# EAGLE board SmartSwitchBoard4x1 (EAGLE 6.2)
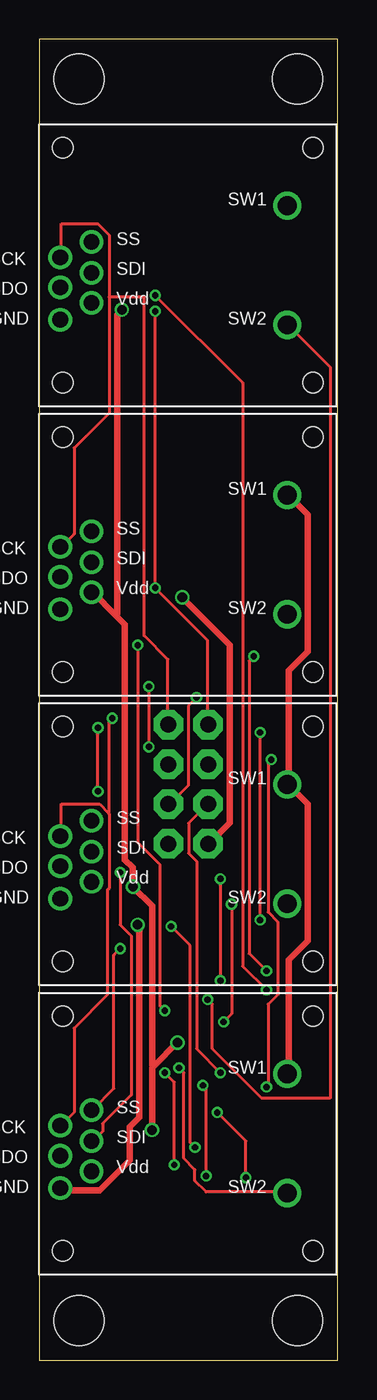
[diagram p0: board, top side]
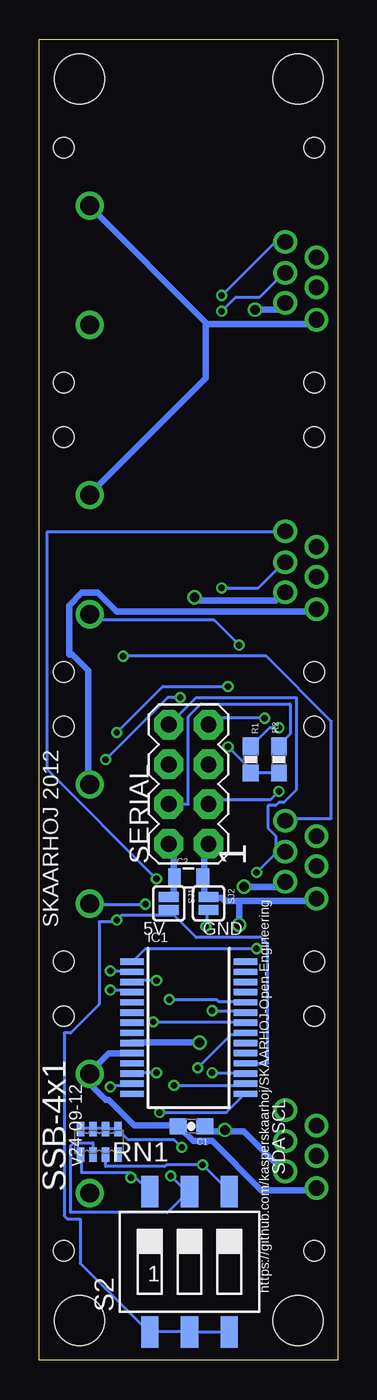
[diagram p1: board, bottom side, seen from below]

Size 19.08 x 84.45 mm. Coordinates in mm from the lower left corner, seen from the top.
Outline: 0,0 19.08,0 19.08,84.45 0,84.45 0,0
Copper layers (1*16): Top 0.035mm / dielectric 1.5mm / Bottom 0.035mm
Design rules: minimum track width 6mil, minimum drill 12mil, track to track 6mil, track to pad 6mil, pad to pad 6mil, via to via 6mil, smd to smd 0mil, copper to edge 10mil, drill to drill 10mil, minimum pad ring 10mil, minimum via ring 6mil, stop-mask expansion 2mil, vias tented up to drill 100mil, thermal gap 10mil
Net classes: 0 default: width 0.203 mm, drill 0.406 mm, clearance 0.203 mm; 1 Power: width 0.406 mm, drill 0.61 mm, clearance 0.203 mm
Holes 3.2 mm at 2.54,81.92 2.54,2.54 16.51,2.54 16.51,81.92

## Footprints (pad centres in the part's own frame; a part is rotated, then mirrored left to right if it is on the bottom)
0603-CAP = smd 1.1 x 1: 1 -0.85,0; 2 0.85,0
0805 = smd 0.8 x 1.2: 1 -0.9,0; 2 0.9,0
SSOP28 = smd 0.4 x 1.5: 1 -4.225,-3.625; 2 -3.575,-3.625; 3 -2.925,-3.625; 4 -2.275,-3.625; 5 -1.625,-3.625; 6 -0.975,-3.625; 7 -0.325,-3.625; 8 0.325,-3.625; 9 0.975,-3.625; 10 1.625,-3.625; 11 2.275,-3.625; 12 2.925,-3.625; 13 3.575,-3.625; 14 4.225,-3.625; 15 4.225,3.625; 16 3.575,3.625; 17 2.925,3.625; 18 2.275,3.625; 19 1.625,3.625; 20 0.975,3.625; 21 0.325,3.625; 22 -0.325,3.625; 23 -0.975,3.625; 24 -1.625,3.625; 25 -2.275,3.625; 26 -2.925,3.625; 27 -3.575,3.625; 28 -4.225,3.625
0603-RES = smd 1.1 x 1: 1 -0.85,0; 2 0.85,0
CAY16_HAND = smd 0.5 x 0.904: 1 -1.2,-0.813; 2 -0.4,-0.813; 3 0.4,-0.813; 4 1.2,-0.813; 5 1.2,0.813; 6 0.4,0.813; 7 -0.4,0.813; 8 -1.2,0.813
SMS-003 = smd 1.092 x 2.007: 1 -2.54,-4.496; 2 0,-4.496; 3 2.54,-4.496; 4 2.54,4.496; 5 0,4.496; 6 -2.54,4.496
2X4 = drill 1.016 pad 1.88 octagon: 1 -3.81,-1.27; 2 -3.81,1.27; 3 -1.27,-1.27; 4 -1.27,1.27; 5 1.27,-1.27; 6 1.27,1.27; 7 3.81,-1.27; 8 3.81,1.27
SJ_2S = smd 0.635 x 1.27: 1 -0.412,0; 2 0.412,0
SMART_SWITCH = drill 1.2: 1 6.35,3.81; 2 6.35,-3.81 | drill 1: 3 -8.153,-3.48; 4 -6.147,-2.413; 5 -8.153,-1.422; 6 -6.147,-0.483; 7 -8.153,0.508; 8 -6.147,1.499 | hole 1.3: -8.001,7.506; 8.001,7.506; 8.001,-7.506; -8.001,-7.506

## Placement (x,y rotation side)
C1  100nF  [0603-CAP]  9.35,14.96 0 bottom
C3  10uF  [0805]  9.53,30.84 0 bottom
IC1  MCP23017SS  [SSOP28]  9.53,21.26 270 bottom
R1  10K  [0603-RES]  5.56,38.4 90 bottom
R2  10K  [0603-RES]  3.76,38.4 90 bottom
RN1  10K  [CAY16_HAND]  15.24,13.97 180 bottom
S2  SWS003  [SMS-003]  9.47,6.3 0 bottom
SERIAL  M04X2  [2X4]  9.53,36.83 90 bottom
SJ1  SOLDERJUMPERNC  [SJ_2S]  10.79,29.21 270 bottom
SJ2  SOLDERJUMPERNC  [SJ_2S]  8.26,29.21 270 bottom
U$2  SMART_SWITCHSMART_SWITCH_8PIN  [SMART_SWITCH]  9.5,14.5 0 top
U$3  SMART_SWITCHSMART_SWITCH_8PIN  [SMART_SWITCH]  9.5,33 0 top
U$4  SMART_SWITCHSMART_SWITCH_8PIN  [SMART_SWITCH]  9.5,51.5 0 top
U$5  SMART_SWITCHSMART_SWITCH_8PIN  [SMART_SWITCH]  9.5,70 0 top

## Library data of the parts
C1 C3 R1 R2 SERIAL SJ1 SJ2 = SparkFun
IC1 = microchip; MF: MICROCHIP; MPN: MCP23017-E/SS; OC_FARNELL: 1467674; OC_NEWARK: 31K2960
RN1 = SKAARHOJ; OC_FARNELL: unknown; OC_NEWARK: unknown
S2 = smd-special
U$2-U$5 = SKAARHOJ

## Nets
5V [Power]: C1.2 C3.1 IC1.9 SERIAL.2 SJ1.1 U$2.4 U$3.4 U$4.4 U$5.4
5VL: IC1.18 R1.1 R2.1 S2.1 S2.2 S2.3 SJ1.2
A0: IC1.15 RN1.5 S2.6
A1: IC1.16 RN1.6 S2.5
A2: IC1.17 RN1.7 S2.4
DISP_DATA_OUT: SERIAL.6
GND [Power]: C1.1 C3.2 IC1.10 SERIAL.1 SJ2.1 U$2.1 U$2.3 U$3.1 U$3.3 U$4.1 U$4.3 U$5.1 U$5.3
GNDL: RN1.1 RN1.2 RN1.3 RN1.4 SJ2.2
GPA0: IC1.21 U$2.2
GPA1: IC1.22 U$3.2
GPA2: IC1.23 U$4.2
GPA3: IC1.24 U$5.2
GPB0: IC1.1 U$2.8
GPB1: IC1.2 U$3.8
GPB2: IC1.3 U$4.8
GPB3: IC1.4 U$5.8
I2C_SCL: IC1.12 R2.2 SERIAL.4
I2C_SDA: IC1.13 R1.2 SERIAL.3
SDI_MOSI: SERIAL.8 U$2.6 U$3.6 U$4.6 U$5.6
SDI_SCLK: SERIAL.7 U$2.7 U$3.7 U$4.7 U$5.7
SLIDER_IN: SERIAL.5

## Tracks (layer width: path | path; a pad name or v marks a point on that pad's centre or on a via)
5V  (via drill 0.61)
  Top 0.406: 7.32,18.8 7.21,18.69 v7.21,14.73 | 7.32,18.8 v8.84,20.32 | 7.32,18.8 7.21,18.9 7.21,29.06 v5.99,30.28 5.99,31.5 5.49,32 5.49,47.04 4.88,47.65 | 4.88,47.65 3.45,49.07 U$4.4 | v5.28,67.16 4.98,66.85 4.98,47.75 4.88,47.65 | v9.14,48.77 12.19,45.72 12.19,34.34 10.87,33.02 SERIAL.2
  Bottom 0.406: SJ1.1 10.77,29.67 10.46,29.67 10.46,30.79 C3.1 10.46,30.99 10.46,33.02 SERIAL.2 | 7.21,14.63 5.99,14.63 3.45,12.09 U$2.4 | 7.21,14.63 8.13,14.63 8.43,14.94 C1.2 | v8.84,20.32 13.11,20.32 IC1.9 | v7.21,14.73 7.21,14.63 | v5.99,30.28 3.76,30.28 3.45,30.58 U$3.4 | v5.28,67.16 3.86,67.16 3.45,67.56 U$5.4 | v9.14,48.77 8.94,48.56 3.96,48.56 3.45,49.07 U$4.4
5VL  (via drill 0.41)
  Top 0.203: v7.01,43.08 v7.01,39.22 | v14.12,28.14 v14.12,40.13
  Bottom 0.203: S2.3 7.01,1.83 9.45,1.83 S2.2 9.55,1.83 11.99,1.83 S2.1 12.09,1.83 16.46,6.2 16.46,9.04 17.27,9.04 17.48,9.25 17.48,20.93 17.07,20.93 15.24,22.76 15.24,28.04 14.22,28.04 v14.12,28.14 13.82,28.45 10.57,28.45 10.52,28.5 | R2.1 3.76,37.59 5.49,37.59 R1.1 5.49,37.69 v7.01,39.22 | 10.52,28.5 9.04,27.03 4.88,27.03 4.47,26.62 4.47,19 5.89,19 IC1.18 | 10.52,28.5 10.77,28.75 SJ1.2 | v7.01,43.08 11.18,43.08 v14.12,40.13
A0  (via drill 0.41)
  Top 0.203: v11.38,15.85 13.21,14.02 v13.21,11.68
  Bottom 0.203: S2.6 13.06,11.84 | 13.06,11.84 13.21,11.99 16.36,11.99 16.36,13.11 RN1.5 | v11.38,15.85 7.11,15.85 5.99,16.97 IC1.15 | 13.06,11.84 v13.21,11.68
A1  (via drill 0.41)
  Top 0.203: v10.46,17.58 10.67,17.37 v10.67,11.79
  Bottom 0.203: RN1.6 15.65,13.21 15.65,13.92 16.87,13.92 17.07,13.72 17.07,9.45 10.87,9.45 9.55,10.77 S2.5 9.65,10.77 v10.67,11.79 | v10.46,17.58 6.1,17.58 5.99,17.68 IC1.16
A2  (via drill 0.41)
  Top 0.203: v8.03,18.39 8.64,17.78 v8.64,12.5
  Bottom 0.203: S2.4 v8.64,12.5 10.97,12.5 11.07,12.39 14.83,12.39 14.83,13.11 RN1.7 | v8.03,18.39 5.99,18.39 IC1.17
GND  (via drill 0.61)
  Top 0.406: v6.3,27.84 6.4,27.74 6.4,15.54 5.79,14.94 5.79,12.8 3.86,10.87 1.42,10.87 1.42,10.97 U$2.3 | U$2.1 15.95,18.39 15.95,25.6 17.17,26.82 17.17,35.56 15.95,36.78 U$3.1 15.95,36.98 15.95,44.09 17.17,45.31 17.17,54.05 15.95,55.27 U$4.1
  Bottom 0.406: 8.33,66.24 1.63,66.24 1.42,66.45 U$5.3 | 8.33,66.24 15.85,73.76 U$5.1 | U$4.1 15.85,55.37 8.43,62.79 8.43,66.14 8.33,66.24 | U$4.3 1.42,47.95 1.52,47.85 14.12,47.85 15.34,49.07 16.36,49.07 17.17,48.26 17.17,45.11 16.97,45.11 15.95,44.09 15.95,36.88 U$3.1 | SERIAL.1 8.53,33.02 8.53,30.99 C3.2 8.53,30.79 8.53,29.67 8.33,29.67 SJ2.1 8.13,29.57 7.42,29.57 7.21,29.36 6.3,29.36 | 6.3,29.36 1.52,29.36 1.42,29.46 U$3.3 | IC1.10 13.21,19.61 14.63,19.61 15.75,18.49 U$2.1 15.85,18.29 15.85,17.68 14.83,16.66 14.63,16.66 13.01,15.04 10.26,15.04 C1.1 10.06,14.83 9.25,14.02 8.03,14.02 4.88,10.87 1.52,10.87 1.42,10.97 U$2.3 | v6.3,27.84 6.3,29.36
GNDL  (via drill 0.41)
  Top 0.203: v8.43,27.74 9.65,26.52 9.65,13.92 v9.96,13.61
  Bottom 0.203: RN1.4 16.36,14.83 15.65,14.83 RN1.3 15.54,14.83 14.94,14.83 RN1.2 14.83,14.83 14.12,14.83 RN1.1 14.02,14.73 13.41,14.12 10.46,14.12 v9.96,13.61 | v8.43,27.74 8.33,27.74 8.33,28.75 SJ2.2
GPA0  (via drill 0.41)
  Top 0.203: v8.94,18.69 9.25,18.39 9.25,12.9 9.96,12.19 9.96,11.48 10.67,10.77 15.85,10.77 U$2.2
  Bottom 0.203: v8.94,18.69 6.81,20.83 6.1,20.83 5.99,20.93 IC1.21
GPA1  (via drill 0.41)
  Top 0.203: v11.79,21.64 12.29,22.15 v12.29,29.16
  Bottom 0.203: v11.79,21.64 5.99,21.64 IC1.22 | v12.29,29.16 15.85,29.16 U$3.2
GPA2  (via drill 0.41)
  Top 0.203: v8.03,22.35 7.72,22.66 7.72,31.7 6.3,33.12 v6.3,45.72
  Bottom 0.203: v8.03,22.35 6.1,22.35 5.99,22.25 IC1.23 | v6.3,45.72 7.92,47.35 15.54,47.35 15.85,47.65 U$4.2
GPA3  (via drill 0.41)
  Top 0.203: v10.77,23.06 11.07,22.76 11.07,19.91 14.22,16.76 18.59,16.76 18.59,63.5 15.95,66.14 U$5.2
  Bottom 0.203: v10.77,23.06 7.72,23.06 7.62,22.96 5.99,22.96 IC1.24
GPB0  (via drill 0.41)
  Top 0.203: v5.18,26.31 4.78,25.91 4.78,17.37 3.45,16.05 U$2.8
  Bottom 0.203: v5.18,26.31 12.29,26.31 13.11,25.5 IC1.1
GPB1  (via drill 0.41)
  Top 0.203: v14.53,24.89 13.41,26.01 13.41,44.7 v13.72,45.01
  Bottom 0.203: v14.53,24.89 13.21,24.89 IC1.2 | v13.72,45.01 4.57,45.01 0.41,40.84 0.41,34.65 3.25,34.65 3.35,34.54 U$3.8
GPB2  (via drill 0.41)
  Top 0.203: v11.58,30.79 v11.58,24.28
  Bottom 0.203: v11.58,24.28 13.11,24.28 IC1.3 | v11.58,30.79 18.59,37.8 18.59,52.93 3.45,52.93 U$4.8
GPB3  (via drill 0.41)
  Top 0.203: v14.53,23.67 13.01,25.2 13.01,62.48 v7.42,68.07
  Bottom 0.203: v14.53,23.67 13.31,23.67 13.21,23.57 IC1.4 | v7.42,68.07 4.06,71.42 3.45,71.42 U$5.8
I2C_SCL  (via drill 0.41)
  Top 0.203: v11.58,18.39 10.06,19.91 10.06,31.9 9.55,32.41 9.55,34.34 10.77,35.56 SERIAL.4
  Bottom 0.203: SERIAL.4 9.55,35.56 9.55,41.15 8.74,41.96 3.05,41.96 3.05,40.03 3.76,39.32 R2.2 | v11.58,18.39 13.11,18.39 IC1.12
I2C_SDA  (via drill 0.41)
  Top 0.203: v3.76,36.37 v3.76,40.44 | v14.53,17.48 14.63,17.58 14.63,22.76 15.24,23.37 15.24,28.04 14.63,28.65 14.63,38.2 v14.83,38.41 | v10.06,42.37 9.55,41.86 9.55,36.78 8.33,35.56 SERIAL.3
  Bottom 0.203: v3.76,40.44 4.37,40.44 5.49,39.32 R1.2 | v3.76,36.37 4.27,35.87 7.92,35.87 8.23,35.56 SERIAL.3 | v14.53,17.48 14.43,17.58 13.31,17.58 13.21,17.68 IC1.13 | v14.83,38.41 10.87,42.37 v10.06,42.37
SDI_MOSI  (via drill 0.41)
  Top 0.203: v5.18,31.19 5.18,27.84 5.89,27.13 5.89,16.97 4.06,15.14 4.06,14.63 3.45,14.02 U$2.6 | SERIAL.8 10.77,40.64 10.77,46.02 v7.42,49.38 v7.42,67.06
  Bottom 0.203: v5.18,31.19 3.86,32.51 3.45,32.51 U$3.6 3.96,32.51 3.96,33.53 4.47,34.04 4.47,35.46 3.96,35.46 3.76,35.66 3.45,35.66 2.64,36.47 2.64,42.37 9.04,42.37 10.77,40.64 SERIAL.8 | v7.42,49.38 5.08,49.38 3.45,51 U$4.6 | v7.42,67.06 6.5,67.97 4.98,67.97 3.45,69.49 U$5.6
SDI_SCLK  (via drill 0.41)
  Top 0.203: 4.47,67.97 4.47,71.93 3.76,72.64 1.42,72.64 1.42,70.51 U$5.7 | 4.47,67.97 4.47,60.55 2.23,58.32 2.23,52.83 1.42,52.02 U$4.7 | 4.42,35 3.86,35.56 1.42,35.56 1.42,33.53 U$3.7 | 4.42,35 4.47,34.95 4.47,30.18 4.37,30.07 4.37,23.37 2.23,21.23 2.23,15.85 1.42,15.04 U$2.7 | v4.67,41.05 4.47,40.84 4.47,35.05 4.42,35 | 4.47,67.97 6.71,67.97 6.71,46.33 8.23,44.81 8.23,40.64 SERIAL.7
  Bottom 0.203: v4.67,41.05 7.82,41.05 8.23,40.64 SERIAL.7

## Text on the board
_bsilk: SKAARHOJ 2012 | 1 | GND | 5V | SSB-4x1 | v24-09-12 | SCL | SDA | https://github.com/kasperskaarhoj/SKAARHOJ-Open-Engineering